# Altium PCB BHI_EVAL.PcbDoc
Units mil, origin at the board's own origin, x right, y up, seen from the top; angles counter-clockwise.
Board outline 830 x 700 mil, 2 copper layers (Top Layer, Bottom Layer); 19 components, 18 nets, 68 pads, 16 vias.
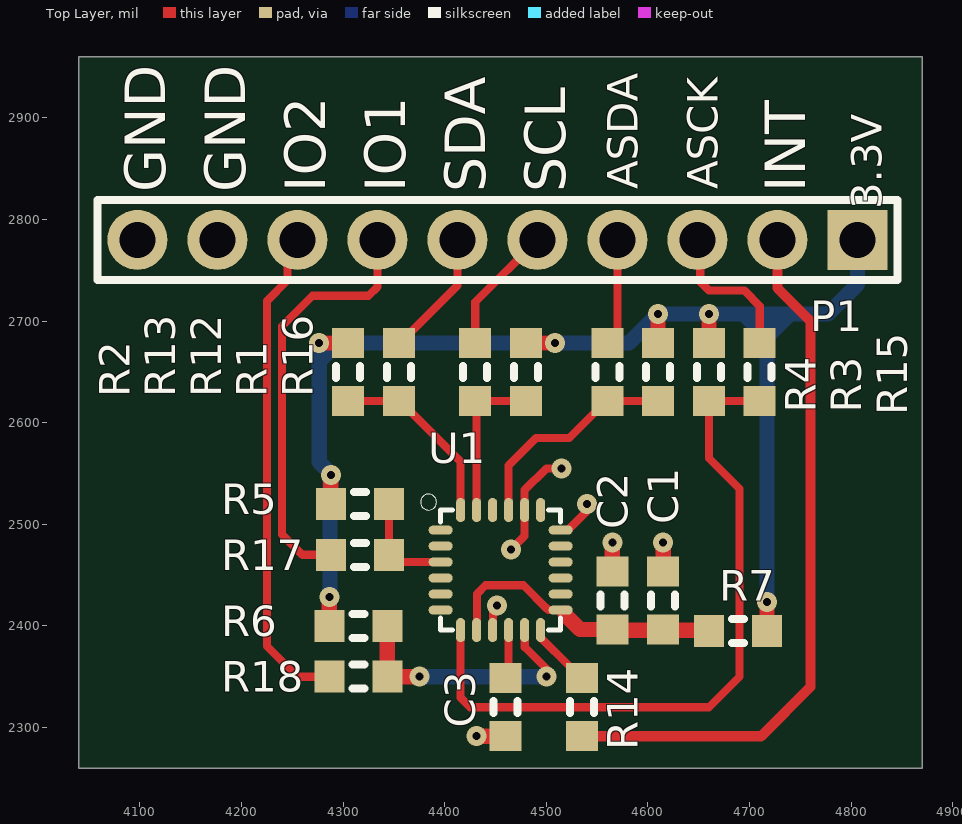
[diagram p0: Top Layer view]
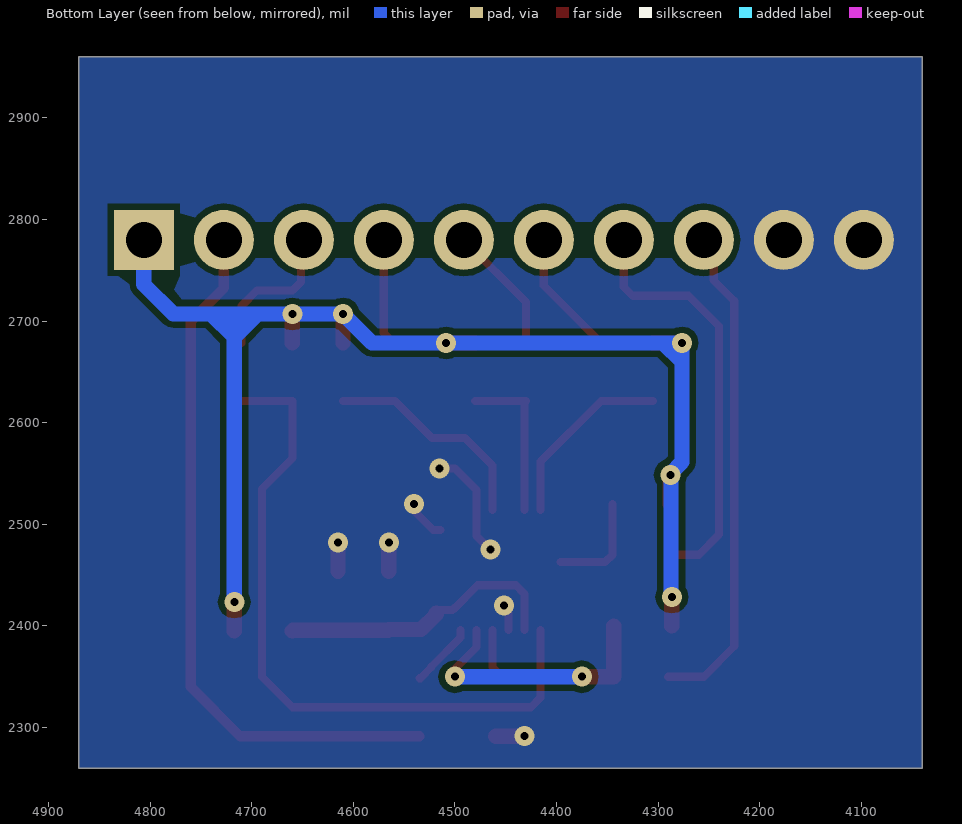
[diagram p1: Bottom Layer view, seen from below]
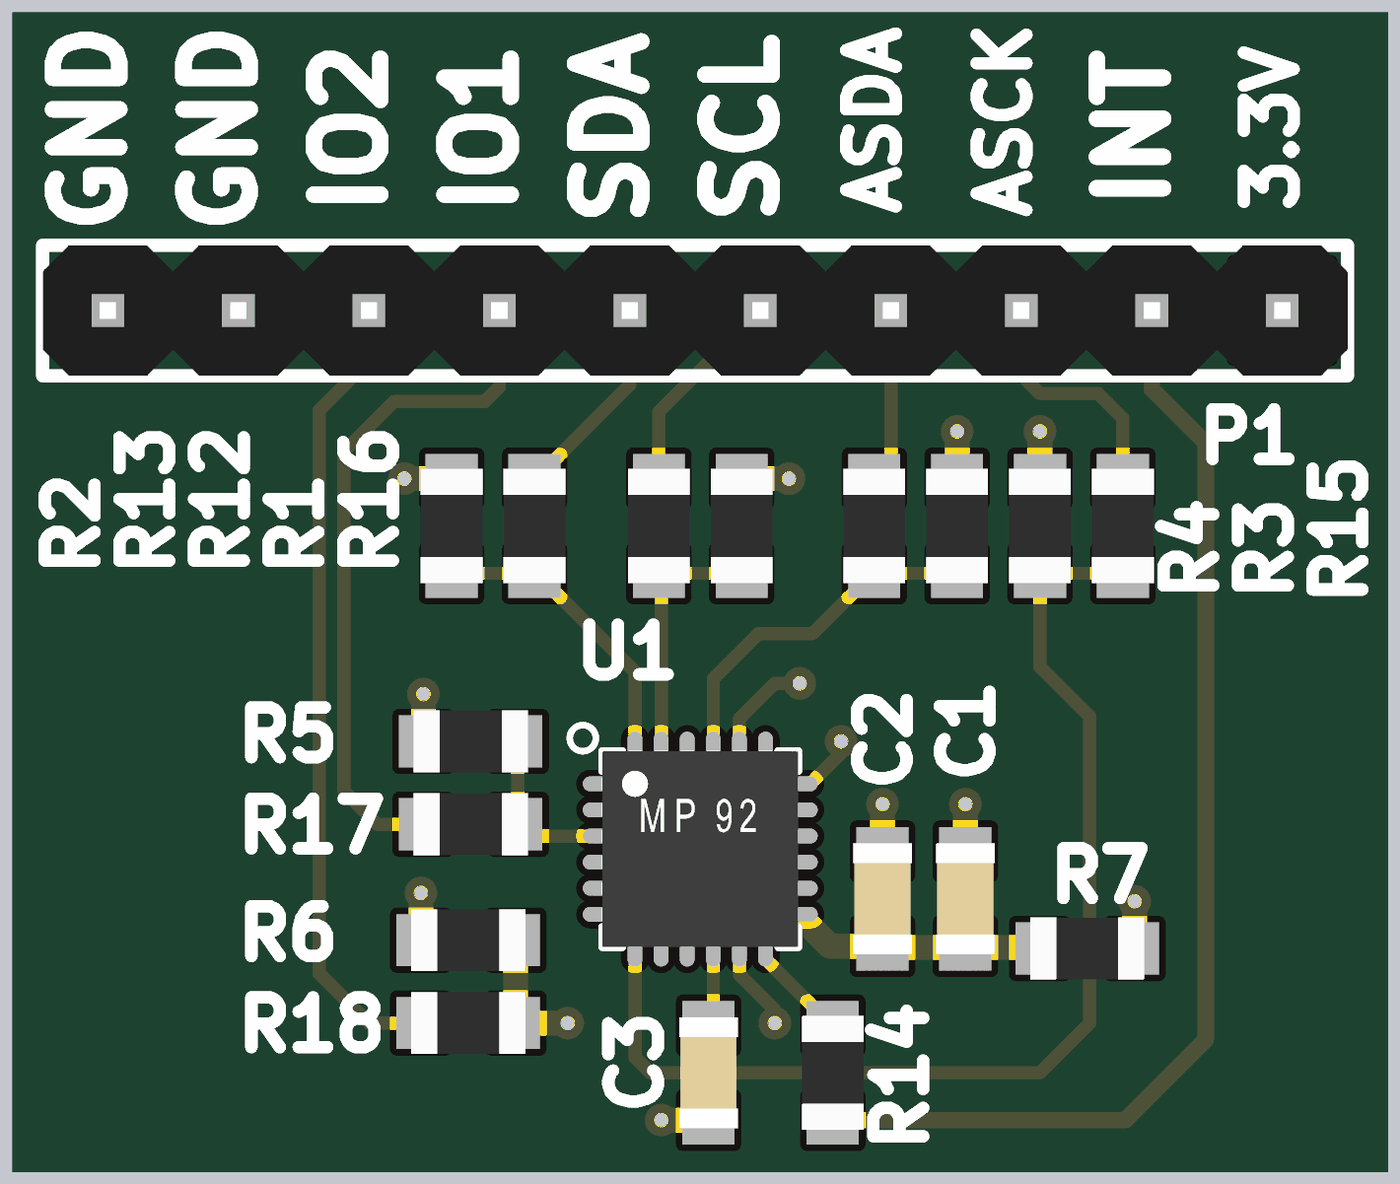
[diagram p2: 3D render of the assembled board from above, using the file's embedded part models]

## Layer stack, top to bottom
Top Solder: solder mask 0.4, Solder Resist, Dk 3.5
Top Layer: signal copper 1.4
Dielectric 1: dielectric 12.6, FR-4, Dk 4.8
Bottom Layer: signal copper 1.4
Bottom Solder: solder mask 0.4, Solder Resist, Dk 3.5

## Board outline
4040,2260 4040,2960 4870,2960 4870,2260

## Design rules (kind name [scope] priority, off if disabled: settings)
Clearance [All] p1: gap=6 ignorepadtopadclearanceinfootprint=FALSE
DiffPairsRouting [All] p1: maxlimit=10 minlimit=6 mostfreqgap=6 toplayer_minwidth=7 toplayer_maxwidth=15 toplayer_prefwidth=7 bottomlayer_minwidth=7 bottomlayer_maxwidth=15 bottomlayer_prefwidth=7 maxuncoupledlength=500
FabricationTestPointUsage TestPointUsage [All] p1: valid=0 allowmultiple=FALSE
FabricationTestpoint Testpoint [All] p1: side=3 testpointundercomponent=TRUE minsize=40 maxsize=100 preferedsize=60 minholesize=20 maxholesize=40 preferedholesize=32 testpointgrid=1 allowsidetop=TRUE allowsidebottom=TRUE usegrid=TRUE gridtolerance=0.01
Height [All] p1: minheight=0 maxheight=3937.01 prefheight=500
HoleSize [All] p1: absolutevalues=TRUE maxlimit=393.7 minlimit=7.87 maxpercent=80.000 minpercent=20.000
MinimumAnnularRing [All] p1: minimumring=6
MinimumSolderMaskSliver [All] p1: minsoldermaskwidth=6
PlaneConnect PlaneConnect_1 [IsVia] p1: planeconnectstyle=Direct reliefexpansion=20 reliefentries=4 reliefconductorwidth=10 reliefairgap=10
PlaneConnect [All] p2: planeconnectstyle=Direct reliefexpansion=20 reliefentries=4 reliefconductorwidth=10 reliefairgap=10
PolygonConnect PolygonConnect_1 [isvia] p1: connectstyle=Direct reliefconductorwidth=10 reliefentries=4 polygonreliefangle="90 Angle" airgapwidth=10
PolygonConnect [All] p2: thpad.connectstyle=Direct thpad.reliefconductorwidth=15 thpad.reliefentries=4 thpad.polygonreliefangle="45 Angle" thpad.airgapwidth=10 smdpad.connectstyle=Direct smdpad.reliefconductorwidth=15 smdpad.reliefentries=4 smdpad.polygonreliefangle="45 Angle" smdpad.airgapwidth=10 via.connectstyle=Relief via.reliefconductorwidth=15 via.reliefentries=4 via.polygonreliefangle="45 Angle" via.airgapwidth=10
RoutingVias [All] p1: holewidth=12 width=30 viastyle="Through Hole" minholewidth=7.87 minwidth=19.68 maxholewidth=787.4 maxwidth=1181.1
SilkToSolderMaskClearance [IsPad] p1: minsilkscreentomaskgap=3 clearancetoexposedcopper=TRUE
SolderMaskExpansion [All] p1: expansion=4 istentingtop=FALSE
UnRoutedNet [All] p1: checkbadconnections=TRUE
Width [All] p1: maxlimit=200 minlimit=6 preferedwidth=6
21 further rules are at their usual default settings.

## Components (designator, comment, footprint, x,y, rotation, side; value= is the part's Value field where it differs from the comment)
C1 "Ceramic X7R" C_0603_1608 4615,2425 r90 top value=1uF
C2 "Ceramic X7R" C_0603_1608 4565,2425 r90 top value=100nF
C3 "Ceramic X7R" C_0603_1608 4460,2320 r270 top value=470nF
P1 "Goldpin" P_HEADER_1x10_2.0 4806.22,2780 r180 top value=DS1025-01-1*10P8BV1-B
R1 "Resistor" R_0603_1608 4480,2650 r90 top value=4.7k
R2 "Resistor" R_0603_1608 4305,2650 r90 top value=4.7k
R3 "Resistor" R_0603_1608 4660,2650 r90 top value=4.7k
R4 "Resistor" R_0603_1608 4610,2650 r90 top value=4.7k
R5 "Resistor" R_0603_1608 4316.46,2520 r180 top value=4.7k
R6 "Resistor" R_0603_1608 4315,2400 r180 top value=4.7k
R7 "Resistor" R_0603_1608 4688.54,2395 r180 top value=10R
R12 "Resistor" R_0603_1608 4430,2650 r90 top value=10R
R13 "Resistor" R_0603_1608 4355,2650 r90 top value=10R
R14 "Resistor" R_0603_1608 4535,2320 r270 top value=10R
R15 "Resistor" R_0603_1608 4710,2650 r90 top value=10R
R16 "Resistor" R_0603_1608 4560,2650 r90 top value=10R
R17 "Resistor" R_0603_1608 4316.46,2470 r180 top value=10R
R18 "Resistor" R_0603_1608 4315,2350 r180 top value=10R
U1 "Three Axis Ultra Low Power Sensor Hub - LGA-24" QFN24_3x3 4455,2455 r0 top value=BHI160

## Footprints (in the part's own frame and the unit in brackets; to place one, negate y for a bottom-side part, rotate by r counter-clockwise, add the part's x,y. Pads: shape width x height; smd on the part's side, far side on the other; paste and mask are expansions set on the pad)
C_0603_1608 [mm]
  rect 0.75x0.8 smd: 1(-0.725,0) 2(0.725,0)
  silkscreen extent -0.15,-0.3 0.15,0.3, body extent -0.85,-0.45 0.85,0.45, height 0.89
P_HEADER_1x10_2.0 [mm] "Connector; Header; 10 Position; Male"
  rect 1.5x1.5 hole 0.9: 1(0,0)
  round 1.5 hole 0.9: 2(2,0) 3(4,0) 4(6,0) 5(8,0) 6(10,0) 7(12,0) 8(14,0) 9(16,0) 10(18,0)
  silkscreen extent -1,-1 19,1, body extent -1,-1 19,1, height 6
QFN24_3x3 [mm]
  rrect100% 0.6x0.23 smd: 1(-1.5,1) 2(-1.5,0.6) 3(-1.5,0.2) 4(-1.5,-0.2) 5(-1.5,-0.6) 6(-1.5,-1) 13(1.5,-1) 14(1.5,-0.6) 15(1.5,-0.2) 16(1.5,0.2) 17(1.5,0.6) 18(1.5,1)
  rrect100% 0.23x0.6 smd: 7(-1,-1.5) 8(-0.6,-1.5) 9(-0.2,-1.5) 10(0.2,-1.5) 11(0.6,-1.5) 12(1,-1.5) 19(1,1.5) 20(0.6,1.5) 21(0.2,1.5) 22(-0.2,1.5) 23(-0.6,1.5) 24(-1,1.5)
  silkscreen extent -2,-1.5 1.5,1.9, body extent -1.51,-1.51 1.51,1.51, height 1
R_0603_1608 [mm]
  rect 0.75x0.8 smd: 1(-0.725,0) 2(0.725,0)
  silkscreen extent -0.15,-0.3 0.15,0.3, body extent -0.87,-0.47 0.88,0.48, height 0.54

## Part data
C1: library part C_1uF_25V_X7R_0603_10, "Capacitor", dielectric=X7R, Manufacturer=Samsung, Manufacturer Part Number=CL10B105KA8NNNC, Tolerance (%)=10, voltage=25V, HelpURL=http://www.tme.eu/pl/Document/4a42202b32dab16128fe107dd69598cc/samsung-chip-cap.pdf, Part Number=C_1uF_25V_X7R_0603_10, SCH_Footprint=0603, Supplier 1=TME, Supplier 2="RS Components", Supplier 3=Farnell, Supplier 4=Mouser, Supplier 5=Digi-Key, Supplier Part Number 1=CL10B105KA8NNNC
C2: library part C_100nF_50V_X7R_0603_5, "Capacitor", dielectric=X7R, Manufacturer=Samsung, Manufacturer Part Number=CL10B104JB8NNNC, Tolerance (%)=5, voltage=50V, HelpURL=http://www.tme.eu/pl/Document/4a42202b32dab16128fe107dd69598cc/samsung-chip-cap.pdf, Part Number=C_100nF_50V_X7R_0603_5, SCH_Footprint=0603, Supplier 1=TME, Supplier 2="RS Components", Supplier 3=Farnell, Supplier 4=Mouser, Supplier 5=Digi-Key, Supplier Part Number 1=CL10B104JB8NNNC
C3: library part C_470nF_25V_X7R_0603_10, "Capacitor", dielectric=X7R, Manufacturer=Murata, Manufacturer Part Number=GRM188R71E474KA12D, Tolerance (%)=10, voltage=25V, HelpURL=http://www.farnell.com/datasheets/2048708.pdf, Part Number=C_470nF_25V_X7R_0603_10, SCH_Footprint=0603, Supplier 1=TME, Supplier 2="RS Components", Supplier 3=Farnell, Supplier 4=Mouser, Supplier 5=Digi-Key, Supplier Part Number 2=7235654, Supplier Part Number 3=1828901, Supplier Part Number 4=81-GRM188R71E474KA12, Supplier Part Number 5=490-3291-1-ND
P1: library part P_HEADER_1x10_2.0, "Pin Header", Manufacturer=Connfly, Manufacturer Part Number=DS1025-01-1*10P8BV1-B, Supplier Part Number 1=ZL303-10P, HelpURL=http://datasheet.octopart.com/DS1025-01-1%2A10P8BV1-B-Connfly-datasheet-81854023.pdf, Part Number=P_HEADER_1x10_2.0, SCH_Footprint="1x10 2.0mm", Supplier 1=TME, Supplier 2="RS Components", Supplier 3=Farnell, Supplier 4=Mouser, Supplier 5=Digi-Key, Supplier 6=LCSC
R1 R2 R3 R4 R5 R6: library part R_4.7k_0603_1, Manufacturer=Yageo, Manufacturer Part Number=RC0603FR-074K7L, Power=100mW, Supplier Part Number 1=RC0603FR-074K7, Tolerance=1%, voltage=75V, HelpURL=http://www.farnell.com/datasheets/2167052.pdf?_ga=2.156163131.1690599162.1548417389-1379097396.1542296996&_gac=1.18389067.1547230258.Cj0KCQiAmuHhBRD0ARIsAFWyPwhX8HcvXnM3tA0ZBodZLzDIjH2ZxLpjT5LWo9bad_HPRbU8LfPq44UaAhEwEALw_wcB, Part Number=R_4.7k_0603_1, SCH_Footprint=0603, Supplier 1=TME, Supplier 2="RS Components", Supplier 3=Farnell, Supplier 4=Mouser, Supplier 5=Digi-Key, Supplier 6=LCSC, Supplier Part Number 3=9238565, Supplier Part Number 4=603-RC0603FR-074K7L, Supplier Part Number 5=311-4.70KHRCT-ND
R7 R12 R13 R14 R15 R16 R17 R18: library part R_10R_0603_1, Manufacturer=Royalohm, Manufacturer Part Number=0603SAF100JT5E, Power=100mW, Supplier Part Number 1=SMD0603-10R-1%, Tolerance=1%, voltage=50V, HelpURL=http://www.tme.eu/pl/Document/b315665a56acbc42df513c99b390ad98/ROYALOHM-THICKFILM.pdf, Part Number=R_10R_0603_1, SCH_Footprint=0603, Supplier 1=TME, Supplier 2="RS Components", Supplier 3=Farnell, Supplier 4=Mouser, Supplier 5=Digi-Key
  R12 R13 R14 R15 R16 R17 R18: Supplier 6=LCSC
U1: library part U_BHI160, Manufacturer="Bosch Tools", Manufacturer Part Number=BHI160, HelpURL=https://datasheet.octopart.com/BHI160-Bosch-datasheet-66132459.pdf, Part Number=U_BHI160, SCH_Footprint=QFN24_3x3, Supplier 1=TME, Supplier 2="RS Components", Supplier 3=Farnell, Supplier 4=Mouser, Supplier 5=Digi-Key, Supplier Part Number 4=262-BHI160, Supplier Part Number 5=828-1067-1-ND

## Via types
v1: diameter 19.68, hole 7.87, Top Layer to Bottom Layer, tented both sides, 16 vias

## Nets (pads, with @x,y where several pads share a name; then routed paths per layer and width w, separated by ;. In a path a pad name is that pad's centre, name@x,y a point inside that pad or via, vN(x,y) a via of type N, cw(c..) or ccw(c..) an arc to the next point about the centre after c; other vN are vias at no path point)
+3.3V: P1.1 R1.2 R2.2 R3.2 R4.2 R5.2 R6.2 R7.1 | length 1427.8
  Top Layer w15: v1(4276.46,2678.54) R2.2 ; R6.2 v1(4286.46,2428.54) ; R5.2 v1(4287.91,2548.54) ; R1.2 v1(4508.54,2678.54) ; R4.2 v1(4610,2707.09) ; R3.2 v1(4660,2707.09) ; R7.1 v1(4717.09,2423.54)
  Bottom Layer w15: v1(4286.46,2428.54) 4287.18,2429.27 4287.18,2547.82 v1(4287.91,2548.54) 4287.91,2549.81 4276.46,2561.27 4276.46,2660 ; v1(4717.09,2423.54) 4717.09,2684.17 ; P1.1 4806.22,2736.22 4777.09,2707.09 4740,2707.09 ; 4276.46,2660 v1(4276.46,2678.54) 4295,2678.54 ; 4276.46,2660 4295,2678.54 ; 4295,2678.54 v1(4508.54,2678.54) 4581.46,2678.54 v1(4610,2707.09) v1(4660,2707.09) 4694.17,2707.09 ; 4694.17,2707.09 4718.54,2707.09 ; 4694.17,2707.09 4717.09,2684.17 ; 4717.09,2684.17 4717.09,2705.63 4718.54,2707.09 ; 4717.09,2684.17 4740,2707.09 ; 4718.54,2707.09 4740,2707.09
ASCK: R3.1 R15.1 U1.7 | length 691.1
  Top Layer w8: U1.7 4415.63,2329.37 4425,2320 4660,2320 4690,2350 4690,2535 4660,2565 R3.1 R15.1
ASDA: R4.1 R16.1 U1.21 | length 217.3
  Top Layer w8: U1.21 4462.87,2557.87 4490,2585 4522.56,2585 4559.02,2621.46 R16.1 R4.1
GND: C1.2 C2.2 C3.2 P1.9 P1.10 U1.9 U1.18 U1.20 | length 265.2
  Top Layer w8: U1.9 4447.33,2396.14 4447.33,2412.9 4451.43,2417 v1(4451.43,2420.16) ; v1(4465,2475) 4478.62,2488.62 U1.20 4478.62,2533.62 4500,2555 v1(4515,2555) ; U1.18 4521.34,2494.37 4540,2513.03 v1(4540,2520)
  Top Layer w15: v1(4431.46,2291.46) C3.2 ; C2.2 v1(4565,2482.09) ; C1.2 v1(4615,2482.09)
  Bottom Layer w8: v1(4451.43,2420.16) v1@4451.43,2423.57
GPIO1: R5.1 R17.1 U1.3 | length 103.9
  Top Layer w8: R5.1 R17.1 4352.13,2462.87 U1.3
GPIO2: R6.1 R18.1 U1.11 | length 261.3
  Top Layer w8: U1.11 4478.82,2395.74 4478.82,2379 4500,2357.83 v1(4500,2350)
  Top Layer w15: R6.1 R18.1 v1(4375,2350)
  Bottom Layer w15: v1(4375,2350) v1(4500,2350)
INT: R14.1 U1.12 | length 64.8
  Top Layer w8: U1.12 4494.37,2388.66 4523.25,2359.78 4523.25,2359.31 4534.02,2348.54 R14.1
NetC1_1: C1.1 C2.1 R7.2 U1.8 U1.13 | length 281.5
  Top Layer w8: U1.8 4431.58,2396.14 4431.58,2431.58 4440,2440 4477.61,2440 4500.76,2416.85 4501.29,2416.85 4502.31,2415.83 4513.86,2415.83 U1.13
  Top Layer w15: U1.13@4518.37,2412.66 4518.37,2411.32 4533.23,2396.46 C2.1 4565.73,2395.73 4615,2395.73 4659.27,2395.73 R7.2
NetC3_1: C3.1 U1.10 | length 53
  Top Layer w8: C3.1@4450.98,2348.54 4452.11,2348.54 4462.87,2359.31 U1.10
NetP1_2: P1.2 R14.2 | length 698.6
  Top Layer w10: R14.2 4711.46,2291.46 4760,2340 4760,2700 4727.48,2732.52 P1.2
NetP1_3: P1.3 R15.2 | length 147.3
  Top Layer w8: P1.3 4651.53,2777.21 4651.53,2738.47 4660,2730 4695,2730 4710,2715 R15.2
NetP1_4: P1.4 R16.2 | length 105.6
  Top Layer w8: R16.2 4570,2688.54 P1.4
NetP1_5: P1.5 R12.2 | length 126.8
  Top Layer w8: R12.2 4430,2718.74 P1.5
NetP1_6: P1.6 R13.2 | length 125.9
  Top Layer w8: R13.2 4355.98,2678.54 4412.52,2735.08 P1.6
NetP1_7: P1.7 R17.2 | length 417.3
  Top Layer w8: R17.2 4260,2470 4240,2490 4240,2695 4270,2725 4325,2725 4333.78,2733.78 P1.7
NetP1_8: P1.8 R18.2 | length 489.9
  Top Layer w8: P1.8 4245.27,2770.23 4245.27,2740.27 4225,2720 4225,2380 4255,2350 R18.2 R18.2@4290,2350
SCL: R1.1 R12.1 U1.23 | length 158
  Top Layer w8: U1.23 4431.38,2620.08 R12.1 R1.1
SDA: R2.1 R13.1 U1.24 | length 183.1
  Top Layer w8: R2.1 R13.1 4355.98,2621.46 4415.63,2561.81 U1.24
pads on no net: U1.1 U1.2 U1.4 U1.5 U1.6 U1.14 U1.15 U1.16 U1.17 U1.19 U1.22

## Polygon pours and split planes (outlines as drawn)
GND on Bottom Layer "NONET_L02_P-001" (solid, remove dead copper, pour order 0): 4040,2960 4870,2960 4870,2260 4040,2260

## Silkscreen, mask and mechanical layers (free items; w line width, h text height)
Top Overlay:
  text "ASDA" at 4590,2830.02 h30 r90
  text "ASCK" at 4668.74,2830.02 h30 r90
  text "GND" at 4125,2826.68 h40 r90
  text "GND" at 4203.74,2826.68 h40 r90
  text "IO2" at 4282.48,2826.68 h40 r90
  text "IO1" at 4361.22,2826.68 h40 r90
  text "SDA" at 4439.96,2826.68 h40 r90
  text "SCL" at 4518.7,2826.68 h40 r90
  text "INT" at 4754.92,2826.68 h40 r90
  text "3.3V" at 4830,2810.02 h30 r90
Mechanical 1:
  the board outline again, w6